# Altium PCB NBP16 Xilinx Spartan-II PQ208 Rev1.01.PcbDoc (part 2 of 2)
Units mm, origin at the board's own origin, x right, y up, seen from the top; angles counter-clockwise.
Board outline 69 x 80.99 mm, 2 copper layers (Top Layer, Bottom Layer); 48 components, 186 nets, 518 pads, 188 vias.
Unrouted connection lines stored in the file: 1.
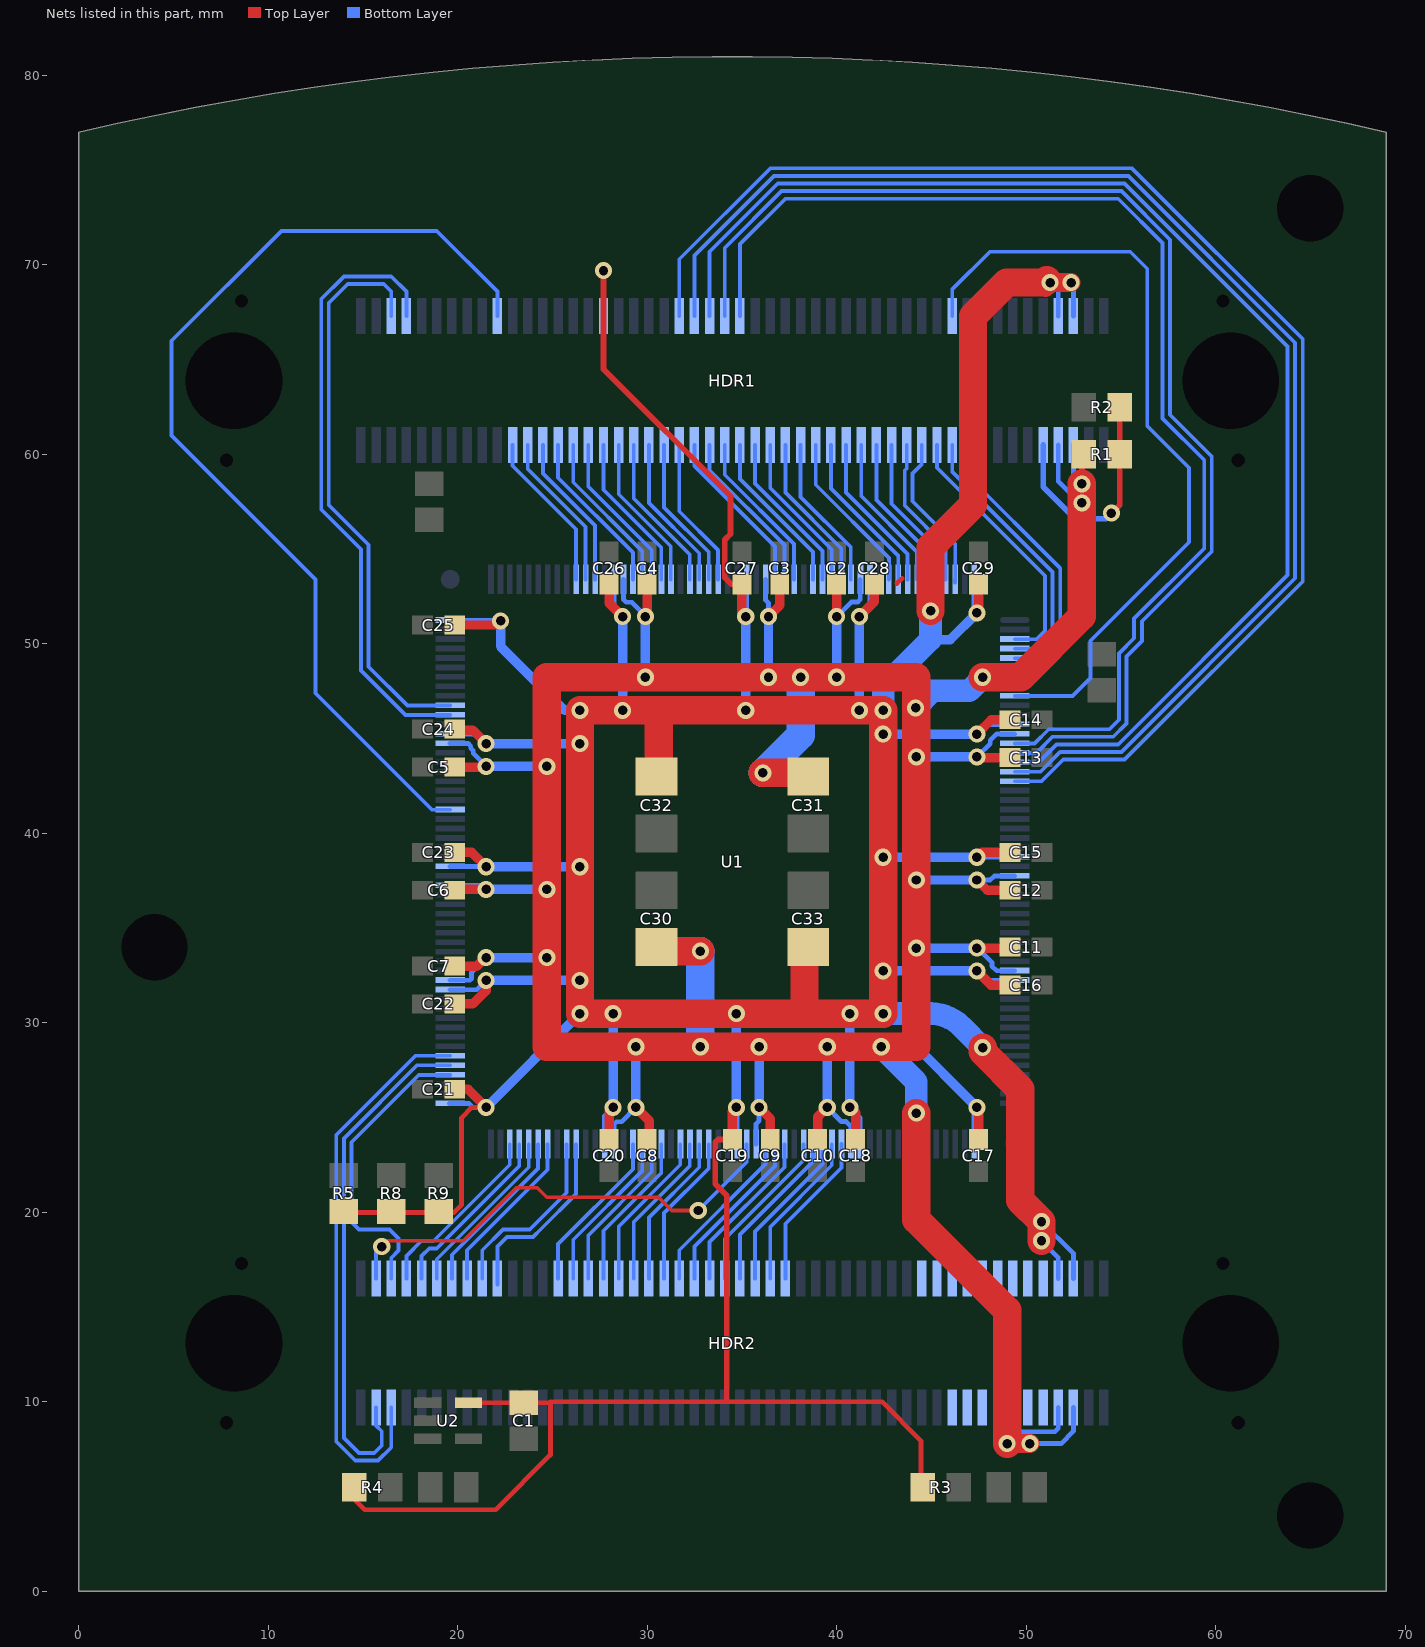
[diagram p2: the nets of this part, all layers, seen from the top]

## Via types
v1: diameter 0.9, hole 0.5, Top Layer to Bottom Layer, tented both sides, 188 vias

## Nets (pads, with @x,y where several pads share a name; then routed paths per layer and width w, separated by ;. In a path a pad name is that pad's centre, name@x,y a point inside that pad or via, vN(x,y) a via of type N, cw(c..) or ccw(c..) an arc to the next point about the centre after c; other vN are vias at no path point) (continued)
NEXUS_TMS: HDR1.80 U1.9 | length 42
  Bottom Layer w0.2: HDR1.80@46.1,67.3 46.1,68.7 48.1,70.7 55.5,70.7 56.4,69.8 56.4,61.5 58.6,59.3 58.6,55.369 53.4,50.169 53.4,48.2 52.45,47.25 U1.9@49.4,47.25
RAM0_DATA0: HDR2.42 U1.81 | length 8.1
  Bottom Layer w0.2: HDR2.42@30.9,16.5 30.9,19.966 33.25,22.316 U1.81@33.25,23.6
RAM0_DATA1: HDR2.40 U1.82 | length 8.2
  Bottom Layer w0.2: HDR2.40@30.1,16.5 30.1,19.731 32.75,22.381 U1.82@32.75,23.6
RAM0_DATA2: HDR2.38 U1.83 | length 8.3
  Bottom Layer w0.2: HDR2.38@29.3,16.5 29.3,19.497 32.25,22.447 U1.83@32.25,23.6
RAM0_DATA3: HDR2.36 U1.84 | length 8.4
  Bottom Layer w0.2: HDR2.36@28.5,16.5 28.5,19.263 31.75,22.513 U1.84@31.75,23.6
RAM0_DATA4: HDR2.34 U1.86 | length 8.4
  Bottom Layer w0.2: HDR2.34@27.7,16.5 27.7,19.028 30.75,22.078 U1.86@30.75,23.6
RAM0_DATA5: HDR2.32 U1.87 | length 8.5
  Bottom Layer w0.2: HDR2.32@26.9,16.5 26.9,18.794 30.25,22.144 U1.87@30.25,23.6
RAM0_DATA6: HDR2.30 U1.88 | length 8.6
  Bottom Layer w0.2: HDR2.30@26.1,16.5 26.1,18.56 29.75,22.21 U1.88@29.75,23.6
RAM0_DATA7: HDR2.28 U1.89 | length 8.7
  Bottom Layer w0.2: HDR2.28@25.3,16.5 25.3,18.325 29.25,22.275 U1.89@29.25,23.6
RAM0_OE: HDR1.41 U1.180 | length 8.1
  Bottom Layer w0.2: HDR1.41@30.9,60.5 30.9,57.2 33.25,54.85 U1.180@33.25,53.4
RAM0_WE: HDR1.79 U1.4 | length 14.5
  Bottom Layer w0.2: HDR1.79@46.1,60.5 46.1,59.1 51.4,53.8 51.4,50.5 50.65,49.75 U1.4@49.4,49.75
RAM1_DATA0: HDR1.45 U1.187 | length 8.9
  Bottom Layer w0.2: HDR1.45@32.5,60.5 32.5,59.4 36.75,55.15 U1.187@36.75,53.4
RAM1_DATA1: HDR1.49 U1.189 | length 8.6
  Bottom Layer w0.2: HDR1.49@34.1,60.5 34.1,58.931 37.75,55.281 U1.189@37.75,53.4
RAM1_DATA2: HDR1.53 U1.192 | length 8.6
  Bottom Layer w0.2: HDR1.53@35.7,60.5 35.7,58.463 39.25,54.913 U1.192@39.25,53.4
RAM1_DATA3: HDR1.57 U1.194 | length 8.3
  Bottom Layer w0.2: HDR1.57@37.3,60.5 37.3,57.994 40.25,55.044 U1.194@40.25,53.4
RAM1_DATA4: HDR1.55 U1.193 | length 8.4
  Bottom Layer w0.2: HDR1.55@36.5,60.5 36.5,58.228 39.75,54.978 U1.193@39.75,53.4
RAM1_DATA5: HDR1.51 U1.191 | length 8.7
  Bottom Layer w0.2: HDR1.51@34.9,60.5 34.9,58.697 38.75,54.847 U1.191@38.75,53.4
RAM1_DATA6: HDR1.47 U1.188 | length 8.7
  Bottom Layer w0.2: HDR1.47@33.3,60.5 33.3,59.166 37.25,55.216 U1.188@37.25,53.4
RAM1_DATA7: HDR1.43 U1.181 | length 7.9
  Bottom Layer w0.2: HDR1.43@31.7,60.5 31.7,57 33.75,54.95 U1.181@33.75,53.4
RAM1_OE: HDR1.39 U1.179 | length 8.2
  Bottom Layer w0.2: HDR1.39@30.1,60.5 30.1,57.434 32.75,54.784 U1.179@32.75,53.4
RAM1_WE: HDR1.61 U1.199 | length 8.7
  Bottom Layer w0.2: HDR1.61@38.9,60.5 38.9,58.4 42.76,54.54 U1.199@42.76,53.411 ; U1.199@42.75,53.4 U1.199@42.75,53.411
RAM_ADDR0: HDR1.21 U1.166 | length 8.5
  Bottom Layer w0.2: HDR1.21@22.9,60.5 22.9,59.4 26.25,56.05 U1.166@26.25,53.4
RAM_ADDR1: HDR1.25 U1.168 | length 8.2
  Bottom Layer w0.2: HDR1.25@24.5,60.5 24.5,59 27.25,56.25 U1.168@27.25,53.4
RAM_ADDR2: HDR1.29 U1.173 | length 8.6
  Bottom Layer w0.2: HDR1.29@26.1,60.5 26.1,58.534 29.75,54.884 U1.173@29.75,53.4
RAM_ADDR3: HDR1.33 U1.175 | length 8.4
  Bottom Layer w0.2: HDR1.33@27.7,60.5 27.7,58.137 30.75,55.087 U1.175@30.75,53.4
RAM_ADDR4: HDR1.65 U1.201 | length 8.4
  Bottom Layer w0.2: HDR1.65@40.5,60.5 40.5,58 43.75,54.75 U1.201@43.75,53.4
RAM_ADDR5: HDR1.69 U1.203 | length 8.2
  Bottom Layer w0.2: HDR1.69@42.1,60.5 42.1,57.6 44.75,54.95 U1.203@44.75,53.4
RAM_ADDR6: HDR1.73 U1.205 | length 8
  Bottom Layer w0.2: HDR1.73@43.7,60.5 43.7,59.266 43.6,59.166 43.6,57.3 45.75,55.15 U1.205@45.75,53.4
RAM_ADDR7: HDR1.77 U1.3 | length 13.9
  Bottom Layer w0.2: HDR1.77@45.3,60.5 45.3,59.3 51,53.6 51,50.7 50.55,50.25 U1.3@49.4,50.25
RAM_ADDR8: HDR1.75 U1.206 | length 8.4
  Bottom Layer w0.2: HDR1.75@44.5,60.5 44.5,59.5 44,59 44,57.534 46.26,55.275 U1.206@46.26,53.411 ; U1.206@46.25,53.25 U1.206@46.25,53.411
RAM_ADDR9: HDR1.71 U1.204 | length 8.1
  Bottom Layer w0.2: HDR1.71@42.9,60.5 42.9,57.4 45.25,55.05 U1.204@45.25,53.4
RAM_ADDR10: HDR1.67 U1.202 | length 8.3
  Bottom Layer w0.2: HDR1.67@41.3,60.5 41.3,57.8 44.25,54.85 U1.202@44.25,53.4
RAM_ADDR11: HDR1.63 U1.200 | length 8.6
  Bottom Layer w0.2: HDR1.63@39.7,60.5 39.7,58.2 43.26,54.64 U1.200@43.26,53.411 ; U1.200@43.25,53.4 U1.200@43.25,53.411
RAM_ADDR12: HDR1.59 U1.195 | length 8.2
  Bottom Layer w0.2: HDR1.59@38.1,60.5 38.1,57.76 40.75,55.11 U1.195@40.75,53.4
RAM_ADDR13: HDR1.35 U1.176 | length 8.2
  Bottom Layer w0.2: HDR1.35@28.5,60.5 28.5,57.903 31.25,55.153 U1.176@31.25,53.4
RAM_ADDR14: HDR1.31 U1.174 | length 8.5
  Bottom Layer w0.2: HDR1.31@26.9,60.5 26.9,58.3 30.25,54.95 U1.174@30.25,53.4
RAM_ADDR15: HDR1.27 U1.172 | length 8.7
  Bottom Layer w0.2: HDR1.27@25.3,60.5 25.3,58.769 29.25,54.819 U1.172@29.25,53.4
RAM_ADDR16: HDR1.23 U1.167 | length 8.4
  Bottom Layer w0.2: HDR1.23@23.7,60.5 23.7,59.234 26.75,56.184 U1.167@26.75,53.4
RAM_CS: HDR1.37 U1.178 | length 8.3
  Bottom Layer w0.2: HDR1.37@29.3,60.5 29.3,57.669 32.25,54.719 U1.178@32.25,53.4
RED0: HDR1.6 U1.147 | length 30.4
  Bottom Layer w0.2: HDR1.6@16.5,67.3 16.5,68.6 16.1,69 14.2,69 13.2,68 13.2,57.334 15.3,55.234 15.3,48.8 17.35,46.75 U1.147@19.6,46.75
RED1: HDR1.8 U1.146 | length 32.8
  Bottom Layer w0.2: HDR1.8@17.3,67.3 17.3,68.6 16.5,69.4 14,69.4 12.8,68.2 12.8,57.1 14.9,55 14.9,48.6 17.25,46.25 U1.146@19.6,46.25
REF_CLK: HDR2.4 U1.77 | length 24.9
  Top Layer w0.2: v1(15.996,18.196) 16.3,18.5 20.3,18.5 20.7,18.9 23.1,21.3 24.2,21.3 24.7,20.8 30.6,20.8 31.3,20.1 v1(32.7,20.1)
  Bottom Layer w0.2: HDR2.4@15.7,16.5 15.7,17.9 v1(15.996,18.196) ; v1(32.7,20.1) 35.25,22.65 U1.77@35.25,23.6
SCL: HDR2.5 U1.110 | length 29.6
  Bottom Layer w0.2: HDR2.5@16.5,9.7 16.5,7.6 15.8,6.9 14.6,6.9 13.6,7.9 13.6,24.1 17.761,28.261 U1.110@19.61,28.261
SDA: HDR2.3 U1.109 | length 27.6
  Bottom Layer w0.2: HDR2.3@15.7,9.7 15.7,8.75 16,8.45 16,7.7 15.6,7.3 14.8,7.3 14,8.1 14,23.9 17.861,27.761 U1.109@19.61,27.761
SP0: HDR2.79
SP1: HDR2.81
SP2: HDR2.83
SP3: HDR2.85
SP4: HDR2.87
SP5: HDR2.89
SP6: HDR2.91
SP7: HDR2.90
SP8: HDR2.92
SP9: HDR2.88
SP10: HDR2.86
SP11: HDR2.84
SP12: HDR2.82
SP13: HDR2.80
SP14: HDR2.78
SP15: HDR2.76
SPI_CLK: HDR1.46 U1.17 | length 71.8
  Bottom Layer w0.2: HDR1.46@32.5,67.3 32.5,70.5 36.7,74.7 55.4,74.7 64.2,65.9 64.2,53.466 55.034,44.3 51.8,44.3 50.75,43.25 U1.17@49.4,43.25
SPI_DIN: HDR1.44 U1.18 | length 74
  Bottom Layer w0.2: HDR1.44@31.7,67.3 31.7,70.3 36.5,75.1 55.6,75.1 64.6,66.1 64.6,53.3 55.2,43.9 51.966,43.9 50.816,42.75 U1.18@49.4,42.75
SPI_DOUT: HDR1.50 U1.15 | length 64.3
  Bottom Layer w0.2: HDR1.50@34.1,67.3 34.1,70.9 37.1,73.9 55.034,73.9 57.6,71.334 57.6,62.1 59.8,59.9 59.8,54.872 56.126,51.197 56.126,50.16 55.3,49.334 55.3,45.8 54.6,45.1 51.4,45.1 50.55,44.25 U1.15@49.4,44.25
SPI_MODE: HDR1.52 U1.14 | length 62
  Bottom Layer w0.2: HDR1.52@34.9,67.3 34.9,71.1 37.3,73.5 54.869,73.5 57.2,71.169 57.2,61.9 59.4,59.7 59.4,55.037 55.7,51.337 55.7,50.3 54.9,49.5 54.9,46 54.4,45.5 51.2,45.5 50.45,44.75 U1.14@49.4,44.75
SPI_SEL: HDR1.48 U1.16 | length 69.5
  Bottom Layer w0.2: HDR1.48@33.3,67.3 33.3,70.7 36.9,74.3 55.2,74.3 63.8,65.7 63.8,53.631 54.869,44.7 51.6,44.7 50.65,43.75 U1.16@49.41,43.75
SW0: HDR2.44 U1.75 | length 9
  Bottom Layer w0.2: HDR2.44@31.7,16.5 31.7,18 36.25,22.55 U1.75@36.25,23.6
SW1: HDR2.46 U1.74 | length 8.9
  Bottom Layer w0.2: HDR2.46@32.5,16.5 32.5,18.2 36.75,22.45 U1.74@36.75,23.6
SW2: HDR2.48 U1.73 | length 8.7
  Bottom Layer w0.2: HDR2.48@33.3,16.5 33.3,18.434 37.25,22.384 U1.73@37.25,23.6
SW3: HDR2.50 U1.71 | length 8.8
  Bottom Layer w0.2: HDR2.50@34.1,16.5 34.1,18.6 38.25,22.75 U1.71@38.25,23.6
SW4: HDR2.52 U1.70 | length 8.7
  Bottom Layer w0.2: HDR2.52@34.9,16.5 34.9,18.834 38.75,22.684 U1.70@38.75,23.6
SW5: HDR2.54 U1.69 | length 8.6
  Bottom Layer w0.2: HDR2.54@35.7,16.5 35.7,19 39.25,22.55 U1.69@39.25,23.6
SW6: HDR2.56 U1.68 | length 8.4
  Bottom Layer w0.2: HDR2.56@36.5,16.5 36.5,19.234 39.75,22.484 U1.68@39.75,23.6
SW7: HDR2.58 U1.67 | length 8.3
  Bottom Layer w0.2: HDR2.58@37.3,16.5 37.3,19.4 40.26,22.36 U1.67@40.26,23.611
SWC0: HDR2.18 U1.96 | length 9.8
  Bottom Layer w0.2: HDR2.18@21.3,16.5 21.3,18 22.4,19.1 23.812,19.1 25.75,21.038 U1.96@25.75,23.6
SWC1: HDR2.16 U1.98 | length 8.9
  Bottom Layer w0.2: HDR2.16@20.5,16.5 20.5,18 24.75,22.25 U1.98@24.75,23.6
SWC2: HDR2.14 U1.99 | length 9
  Bottom Layer w0.2: HDR2.14@19.7,16.5 19.7,17.766 24.25,22.316 U1.99@24.25,23.6
SWC3: HDR2.6 U1.108 | length 16
  Bottom Layer w0.2: HDR2.6@16.5,16.5 16.5,17.6 16.885,17.985 16.885,18.615 16.4,19.1 14.8,19.1 14.4,19.5 14.4,23.7 17.95,27.25 U1.108@19.6,27.25
SWR0: HDR2.20 U1.95 | length 9.9
  Bottom Layer w0.2: HDR2.20@22.1,16.2 HDR2.20@22.1,16.5 22.1,18.2 22.6,18.7 23.977,18.7 24.412,19.135 26.25,20.973 U1.95@26.25,23.6
SWR1: HDR2.12 U1.100 | length 9.1
  Bottom Layer w0.2: HDR2.12@18.9,16.5 18.9,17.531 23.75,22.381 U1.100@23.75,23.6
SWR2: HDR2.10 U1.101 | length 9.5
  Bottom Layer w0.2: HDR2.10@18.1,16.5 18.1,17.7 18.5,18.1 18.903,18.1 23.25,22.447 U1.101@23.25,23.6
SWR3: HDR2.8 U1.102 | length 9.7
  Bottom Layer w0.2: HDR2.8@17.3,16.5 17.3,17.7 18.1,18.5 18.737,18.5 22.75,22.513 U1.102@22.75,23.6
TEST: HDR1.81 U1.5 | length 15.1
  Bottom Layer w0.2: HDR1.81@46.9,60.5 46.9,58.9 51.8,54 51.8,50.3 50.75,49.25 U1.5@49.4,49.25
VCC: C1.2 C14.1 C15.1 C16.1 C17.2 C18.2 C19.2 C20.2 C21.2 C22.1 C23.1 C24.1 C25.2 C26.2 C27.2 C28.2 C29.2 C32.1 C33.1 HDR1.34 HDR1.94 HDR1.96 HDR2.94 HDR2.96 R3.1 R4.2 R5.1 R8.1 R9.1 U1.12 U1.26 U1.39 U1.53 U1.65 U1.78 U1.92 U1.105 U1.117 U1.130 U1.144 U1.156 U1.170 U1.184 U1.197 U1.208 U2.5 | length 368.1
  Top Layer w0.25: R5.1@13.708,19.992 19.808,19.992 20.208,20.392 20.208,24.992 20.758,25.542 v1(21.508,25.542) ; R4.2@14.55,5.497 14.55,4.85 15.1,4.3 22,4.3 24.9,7.2 24.9,10 ; U2.5@20.575,9.95 C1.2@23.497,9.95 24.85,9.95 24.9,10 ; 43.189,53.192 43.449,53.452 ; R3.1@44.45,5.5 R3.1@44.45,5.503 ; R3.1@44.55,5.503 44.45,5.602 44.45,7.95 42.4,10 24.9,10
  Top Layer w0.3: v1(27.7,69.7) 27.701,64.499 34.4,57.8 34.4,55.8 34.1,55.5 34.1,53.5 34.45,53.15 C27.2@35,53.15 ; 34.2,10.05 34.2,20.9 33.6,21.5 33.6,23.7 33.75,23.85 C19.2@34.5,23.85
  Top Layer w0.5: C24.1@19.758,45.442 20.808,45.442 v1(21.508,44.742) ; C21.2@19.85,26.5 20.55,26.5 v1(21.508,25.542) ; C22.1@19.85,31 20.8,31 21.508,31.708 v1(21.508,32.242) ; C23.1@19.85,39 20.75,39 v1(21.508,38.242) ; C25.2@19.85,51 22.048,51 v1(22.265,51.217) ; C20.2@28,23.85 28,25.334 v1(28.208,25.542) ; C26.2@28.008,53.192 28.008,52.142 v1(28.708,51.442) ; C19.2@34.5,23.85 34.5,25.334 v1(34.708,25.542) ; C27.2@35,53.15 35,51.65 v1(35.208,51.442) ; v1(40.708,25.542) 41,25.25 C18.2@41,23.85 ; v1(41.208,51.442) 42,52.234 C28.2@42,53.15 ; v1(47.408,25.542) 47.5,25.45 C17.2@47.5,23.85 ; v1(47.408,32.742) 48.15,32 C16.1@49.15,32 ; v1(47.408,38.742) 47.666,39 C15.1@49.15,39 ; v1(47.408,45.242) 48.166,46 C14.1@49.15,46 ; v1(47.408,51.642) 47.5,51.734 C29.2@47.5,53.15
  Top Layer w1: v1@51.018,68.819 51.25,69.05 v1(51.275,69.075) v1(52.375,69.075)
  Top Layer w1.5: C32.1@30.608,43.192 30.608,46.492 ; 38.308,30.492 C33.1@38.308,33.792 ; v1(44.958,51.742) 44.958,55.098 47.2,57.34 47.2,67.3 48.975,69.075 50.975,69.075 v1@51.1,69.2 ; v1(47.708,28.692) 47.708,28.489 49.7,26.497 49.7,20.633 v1(50.815,19.518) v1(50.815,18.502) ; v1(26.458,30.492) v1(42.458,30.492) v1(42.458,46.492) v1(26.458,46.492) v1(26.458,30.492)
  Bottom Layer w0.25: U1.105@19.558,25.742 20.608,25.742 20.808,25.542 v1(21.508,25.542) ; U1.117@19.6,31.75 21.016,31.75 v1(21.508,32.242) ; U1.130@19.6,38.25 21.5,38.25 v1(21.508,38.242) ; U1.144@19.6,45.25 21,45.25 v1(21.508,44.742) ; U1.156@19.6,51.25 22.233,51.25 v1(22.265,51.217) v1@21.96,51.242 ; HDR1.34@27.7,67.3 v1(27.7,69.7) ; U1.92@27.75,23.6 27.75,25.084 v1(28.208,25.542) ; U1.170@28.25,53.4 28.25,51.9 v1(28.708,51.442) ; v1(34.708,25.542) 34.75,25.5 U1.78@34.75,23.6 ; v1(35.208,51.442) 35.25,51.484 U1.184@35.25,53.4 ; v1(40.708,25.542) 41.25,25 U1.65@41.25,23.6 ; v1(41.208,51.442) 41.75,51.984 U1.197@41.75,53.4 ; U1.53@47.25,23.6 47.25,25.384 v1(47.408,25.542) ; U1.208@47.25,53.4 47.25,51.8 v1(47.408,51.642) ; v1(47.408,32.742) 47.9,32.25 U1.39@49.4,32.25 ; v1(47.408,38.742) U1.26@49.392,38.742 ; v1(47.408,45.242) 47.916,45.75 U1.12@49.4,45.75 ; v1(50.815,18.502) 51.7,17.617 HDR2.94@51.7,16.5 ; v1(50.815,19.518) 52.5,17.833 HDR2.96@52.5,16.5 ; v1(51.275,69.075) 51.7,68.65 HDR1.94@51.7,67.3 ; v1(52.375,69.075) 52.5,68.95 HDR1.96@52.5,67.3
  Bottom Layer w0.5: v1(21.508,25.542) v1(26.458,30.492) ; v1(21.508,32.242) v1(26.458,32.242) ; v1(21.508,38.242) v1(26.458,38.242) ; v1(21.508,44.742) v1(26.458,44.742) ; v1(22.265,51.217) 22.265,49.871 25.644,46.492 v1(26.458,46.492) ; v1(28.208,25.542) v1(28.208,30.492) ; v1(28.708,46.492) v1(28.708,51.442) ; v1(34.708,25.542) v1(34.708,30.492) ; v1(35.208,46.492) v1(35.208,51.442) ; v1(40.708,25.542) v1(40.708,30.492) ; v1(41.208,46.492) v1(41.208,51.442) ; v1(42.458,32.742) v1(47.408,32.742) ; v1(42.458,38.742) v1(47.408,38.742) ; v1(42.458,45.242) v1(47.408,45.242) ; 43.808,30.492 43.808,29.142 v1(47.408,25.542) ; 44.958,50.233 45.999,50.233 v1(47.408,51.642)
  Bottom Layer w1.2: v1(42.458,30.492) 44.955,30.492 cw(c44.955,28.192) 46.582,29.819 v1(47.708,28.692) ; v1(42.458,46.492) 42.458,47.733 44.958,50.233 v1(44.958,51.742)
VCCINT: C2.1 C3.1 C4.1 C5.1 C6.1 C7.1 C8.1 C9.1 C10.1 C11.1 C12.1 C13.1 C30.1 C31.1 HDR1.93 HDR1.95 HDR2.93 HDR2.95 R1.1 U1.13 U1.28 U1.38 U1.66 U1.76 U1.91 U1.118 U1.128 U1.143 U1.171 U1.186 U1.196 | length 244.3
  Top Layer w0.3: v1(52.95,58.45) 52.95,59.903 R1.1@53.05,60.003
  Top Layer w0.5: C7.1@19.85,33 21.022,33 v1@21.465,33.442 ; C6.1@19.85,37 19.892,37.042 v1(21.508,37.042) ; C5.1@19.85,43.5 21.466,43.5 v1(21.508,43.542) ; v1(29.408,25.542) 30.108,24.842 C8.1@30.108,23.792 ; v1(29.908,51.442) 30,51.534 C4.1@30,53.15 ; v1(35.908,25.542) 36.5,24.95 C9.1@36.5,23.85 ; v1(36.408,51.442) 37,52.034 C3.1@37,53.15 ; C10.1@39,23.85 39,25.034 v1(39.508,25.542) ; v1@40,51.45 C2.1@40,53.15 ; v1(47.408,33.942) 49.092,33.942 C11.1@49.15,34 ; v1(47.408,37.542) 47.95,37 C12.1@49.15,37 ; v1(47.408,44.042) 47.45,44 C13.1@49.15,44
  Top Layer w1: v1@48.783,8.037 v1(49,7.8) v1(50.2,7.8)
  Top Layer w1.5: C30.1@30.608,33.792 v1(32.808,33.792) ; v1(36.108,43.192) C31.1@38.308,43.192 ; v1(44.208,25.242) 44.208,19.623 49,14.831 v1(49,7.8) ; v1(47.708,48.242) 49.72,48.242 52.95,51.473 v1(52.95,58.45) ; 24.708,28.742 44.208,28.742 44.208,48.242 24.708,48.242 24.708,28.742
  Bottom Layer w0.25: U1.118@19.6,32.25 20.65,32.25 20.739,32.339 20.739,32.673 v1(21.508,33.442) ; U1.128@19.6,37.25 21.3,37.25 v1(21.508,37.042) ; U1.143@19.6,44.75 20.55,44.75 20.7,44.6 20.7,44.5 20.826,44.374 20.826,44.224 v1(21.508,43.542) v1@21.458,43.542 ; U1.91@28.25,23.6 28.25,24.65 28.389,24.789 28.654,24.789 v1(29.408,25.542) ; U1.171@28.75,53.4 28.75,52.35 28.9,52.2 29.2,52.2 29.908,51.492 v1(29.908,51.442) ; U1.76@35.75,23.6 35.75,24.684 35.908,24.842 v1(35.908,25.542) ; U1.186@36.25,53.4 36.25,52.3 36.408,52.142 v1(36.408,51.442) ; v1(40.008,51.442) 40.777,52.211 41.111,52.211 41.25,52.35 U1.196@41.25,53.4 ; 40.208,24.842 v1(39.508,25.542) 40.256,24.794 40.506,24.794 40.75,24.55 U1.66@40.75,23.6 ; v1(47.408,33.942) 47.458,33.942 48.2,33.2 48.2,33 48.45,32.75 U1.38@49.4,32.75 ; v1(47.408,37.542) 48.108,37.542 48.316,37.75 U1.28@49.4,37.75 ; v1(47.408,44.042) 48.106,44.741 48.106,44.906 48.45,45.25 U1.13@49.4,45.25 ; v1(49,7.8) 49.65,8.425 51.525,8.425 51.7,8.6 HDR2.93@51.7,9.7 ; v1(50.2,7.8) 51.85,7.8 52.5,8.45 HDR2.95@52.5,9.7 ; 51.7,59.3 HDR1.93@51.7,60.5 51.7,58.575 52.75,57.525 v1(52.949,57.44) ; 52.5,59.425 HDR1.95@52.5,60.5 52.5,58.9 v1(52.95,58.45)
  Bottom Layer w0.5: v1(21.508,33.442) v1(24.708,33.442) ; v1(21.508,37.042) v1(24.708,37.042) ; v1(21.508,43.542) v1(24.708,43.542) ; v1(29.408,25.542) v1(29.408,28.742) ; v1(29.908,48.242) v1(29.908,51.442) ; v1(35.908,25.542) v1(35.908,28.742) ; v1(36.408,48.242) v1(36.408,51.442) ; v1(39.508,25.542) v1(39.508,28.742) ; v1(40.008,48.242) v1(40.008,51.442) ; v1(44.208,33.942) v1(47.408,33.942) ; v1(44.208,37.542) v1(47.408,37.542) ; v1(44.208,44.042) v1(47.408,44.042)
  Bottom Layer w1.2: v1(42.358,28.742) 44.208,26.892 v1(44.208,25.242) ; v1(44.175,46.625) 45.05,47.525 47,47.525 v1(47.708,48.242)
  Bottom Layer w1.5: v1(32.808,28.742) v1(32.808,33.792) ; v1(36.108,43.192) 38.108,45.192 v1(38.108,48.242)
VDRIVE: HDR1.20 U1.136 | length 53.6
  Bottom Layer w0.2: U1.136@19.6,41.25 18.65,41.25 12.5,47.4 12.5,53.4 4.9,61 4.9,66 10.7,71.8 18.9,71.8 22.1,68.6 HDR1.20@22.1,67.3
VREF: HDR1.91 R1.2 R2.1 | length 12.4
  Top Layer w0.3: v1(54.5,56.9) 54.95,57.35 R2.1@54.95,62.497
  Bottom Layer w0.3: HDR1.91@50.9,60.5 50.9,58.3 52.6,56.6 54.2,56.6 v1(54.5,56.9)
pads on no net: HDR1.MH1 HDR1.MH2 HDR1.MH3 HDR1.MH4 HDR1.MH5 HDR1.MH6 HDR2.MH1 HDR2.MH2 HDR2.MH3 HDR2.MH4 HDR2.MH5 HDR2.MH6 U1.55 U1.56 U1.60 U1.149 U1.FID1 U1.FID2 U2.1

## Polygon pours and split planes (outlines as drawn)
GND on Top Layer "Top Layer-GND" (solid, remove dead copper, pour order 1000): 0,0 0,82.2 69,82.2 69,0
GND on Bottom Layer "Bottom Layer-GND" (solid, remove dead copper, pour order 1001): 0,0 0,82.1 69,82.1 69,0

## Keep-outs
Keep-Out Layer:
  the board outline again, w0.8

## Silkscreen, mask and mechanical layers (free items; w line width, h text height)
Top Overlay:
  circle w0.127: c65,73 r2.5
  circle w0.127: c65,4 r2.5
  circle w0.127: c4,34 r2.5
  lines w0.127: 0,1.5 1.5,1.5 1.5,0 ; 0,22.3 1.5,22.3 1.5,23.4 0,23.4 ; 0.001,53.6 1.501,53.6 1.501,54.7 0.001,54.7 ; 0,75.5 1.5,75.5 1.5,77.3 ; 15.7,79.8 15.7,78.1 17,78.1 17,79.9 ; 49.7,80.2 49.7,78.7 51,78.7 51,80.1 ; 67.5,0 67.5,1.5 69,1.5 ; 67.5,77.3 67.5,75.5 69,75.5 ; 68.999,22.3 67.5,22.3 67.5,23.4 69,23.4 ; 69,53.6 67.501,53.6 67.501,54.7 69.001,54.7
Bottom Overlay:
  drawing of 853 lines, arcs and shapes, not listed
  text "REV 1.01" at 47.6,76.5 h1.3
  text "NBP16" at 54.981,76.481 h1.3
  text "1" at 13.97,58.42 h1
  text "1" at 14.224,7.62 h1
PCB Boundary:
  the board outline again, w0.25
  text "PCB boundary coincides with centre-line of tracks and arc" at 0,-12 h0.75
Gerber ID:
  text ".Layer_Name" at 0,-6 h0.75
Printout ID:
  text ".Printout_Name" at 0,-10 h0.75
Design Information:
  drawing of 713 lines, arcs and shapes, not listed
  text "NBP16 REV 1.01" at 317.627,202.041 h1.27
  text "DESIGN INFORMATION" at 261.62,201.914 h1.52
  text "BOARD NAME:" at 299.212,201.914 h1.52
  text "BOARD TECHNOLOGY" at 261.62,199.374 h1.52
  text "BOARD SIZE (REFER ALSO PROFILING INFORMATION)" at 309.88,199.374 h1.27
  text "69.00mm" at 312.6,197.1 h1.52
  text "11.811" at 277.419,197.012 h1.52
  text "81.00mm" at 335.6,197 h1.52
  text "7.874" at 291.389,196.885 h1.52
  text "7.874" at 264.446,196.834 h1.52
  text "X" at 328.549,196.326 h1.78
  text "(MIN. TRACK/   PADS  /   CLEARANCE     IN 0.001'')" at 260.096,194.294 h1.27
  text "MINIMUM ANNULAR RING 0.05MM (0.002'') EXTERNAL PER IPC-2221 CLASS 3 LEVEL C AND IS THE" at 261.62,191.754 h1.27
  text "MANUFACTURING REGISTRATION ALLOWANCE" at 261.62,189.468 h1.27
  text "LAND SIZE CALCULATION MINIMUM - NOMINAL HOLE SIZE + 0.508MM (0.020'')" at 261.62,186.674 h1.27
  text "AS INSTRUCTED" at 347.65,182.28 h1.52
  text "X" at 299.263,182.153 h1.52
  text "CIRCUIT TYPE:" at 261.62,182.102 h1.52
  text "SS" at 284.48,182.102 h1.27
  text "DS" at 302.26,182.102 h1.27
  text "X" at 316.865,182.102 h1.52
  text "PTH" at 320.04,182.102 h1.27
  text "ML" at 330.962,182.102 h1.27
  text "No. OFF" at 337.82,182.102 h1.27
  text "FINGER CONNECTOR DIM PER:" at 261.62,179.054 h1.52
  text "AS SHOWN" at 337.82,179.054 h1.27
  text "No. OFF TOTAL" at 278.384,176.26 h1.52
  text "ONE SIDE" at 320.04,176.26 h1.27
  text "BOTH SIDES" at 337.82,176.006 h1.27
  text "VIAS:" at 261.62,173.339 h1.52
  text "NONE" at 273.05,173.339 h1.14
  text "X" at 281.432,173.339 h1.52
  text "FEED THRU'" at 284.48,173.339 h1.14
  text "X" at 299.212,173.339 h1.52
  text "TENTED" at 302.26,173.339 h1.14
  text "UNIQUE DRILL" at 284.48,170.291 h1.14
  text "2 SIZE" at 302.26,170.291 h1.14
  text "BLIND LAYER SEQUENCE" at 320.04,170.291 h1.14
  text "Layer Stack Manager (Protel)" at 297.053,168.005 h1.27
  text "X" at 334.772,168.005 h1.52
  text "AS SHOWN" at 337.82,168.005 h1.27
  text "LAYER CONSTRUCTION PER:" at 261.62,167.878 h1.52
  text "Protel" at 342.646,165.338 h1.27
  text "(PFW)" at 352.933,165.211 h1.27
  text "ARTWORK:" at 261.62,165.084 h1.52
  text "MANUAL" at 284.48,165.084 h1.27
  text "DIGITISED" at 302.26,165.084 h1.27
  text "X" at 316.992,165.084 h1.52
  text "CAD" at 320.04,165.084 h1.27
  text "TYPE" at 330.962,165.084 h1.27
  text "ARTWORK/PATTERN MASTER LIST" at 261.62,160.385 h1.52
  text "DESCRIPTION" at 262.89,157.972 h1.27
  text "DRAWING No./CAD FILE REF." at 281.559,157.972 h1.27
  text "LAYER NAME" at 322.834,157.972 h1.27
  text "GERBER FILE REF" at 343.586,157.896 h1.27
  text "PCB FILE" at 261.366,155.432 h1.27
  text "BOCD_SpartanII_PQ208" at 281.237,155.356 h1.27
  text "PcbDoc" at 312.979,155.356 h1.02
  text "Top Paste Mask" at 321.158,152.892 h1.02
  text "GTP" at 363.779,152.816 h1.27
  text "GERBER FILE" at 261.366,152.765 h1.27
  text "GTO" at 363.728,150.327 h1.27
  text "Top Overlay" at 321.158,150.301 h1.02
  text "GERBER FILE" at 261.366,150.225 h1.27
  text "Top Solder Mask" at 321.158,147.863 h1.02
  text "GTS" at 363.779,147.736 h1.27
  text "GERBER FILE" at 261.366,147.685 h1.27
  text "TOP LAYER" at 321.158,145.272 h1.02
  text "GTL" at 363.779,145.196 h1.27
  text "GERBER FILE" at 261.366,145.145 h1.27
  text "BOTTOMLAYER" at 321.158,142.732 h1.02
  text "GBL" at 363.779,142.656 h1.27
  text "GERBER FILE" at 261.366,142.605 h1.27
  text "Bottom Solder Mask" at 321.158,140.243 h1.02
  text "GBS" at 363.779,140.116 h1.27
  text "GERBER FILE" at 261.366,140.065 h1.27
  text "Bottom Overlay" at 321.158,137.652 h1.02
  text "GBO" at 363.779,137.576 h1.27
  text "GERBER FILE" at 261.366,137.525 h1.27
  text "Bottom Paste Mask" at 321.158,135.163 h1.02
  text "GBP" at 363.779,135.036 h1.27
  text "GERBER FILE" at 261.366,134.985 h1.27
  text "PCB Boundary" at 321.158,132.572 h1.02
  text "GM1" at 363.779,132.496 h1.27
  text "GERBER FILE" at 261.366,132.445 h1.27
  text "APERTURE LIST" at 261.366,130.032 h1.27
  text "APR" at 313.979,129.956 h1.27
  text "DRILL REPORT" at 261.366,127.492 h1.27
  text "DRR" at 313.979,127.416 h1.27
  text "EXCELLON DRILL" at 261.366,124.952 h1.27
  text "TXT" at 313.979,124.876 h1.27
  text "MATERIAL:" at 261.62,99.298 h1.52
  text "GLASS FIBRE EPOXY RESIN NEMA GRADE FR4 (MIL-S-13949H)" at 287.274,99.044 h1.27
  text "X" at 284.607,98.917 h1.52
  text "THICKNESS:" at 269.494,96.123 h1.27
  text "0.8mm" at 287.274,96.123 h1.27
  text "1.2mm" at 304.927,96.123 h1.27
  text "1.6mm" at 322.58,96.123 h1.27
  text "2.4mm" at 340.36,96.123 h1.27
  text "3.2mm" at 358.14,96.123 h1.27
  text "X" at 320.167,95.996 h1.52
  text "TOLERANCE:" at 269.367,93.075 h1.27
  text "IN A/W IPC-D-300G CLASS" at 287.02,93.075 h1.27
  text "3 LEVEL B" at 321.945,93.075 h1.27
  text "OTHER +/-" at 340.36,93.075 h1.27
  text "X" at 284.607,92.948 h1.52
  text "BOW & TWIST:" at 266.954,90.027 h1.27
  text "IN A/W IPC-D-300G CLASS" at 287.02,90.027 h1.27
  text "3 LEVEL B" at 321.945,90.027 h1.27
  text "AS SHOWN" at 340.487,89.9 h1.27
  text "X" at 284.607,89.773 h1.52
  text "COPPER THICKNESS (FINISHED)" at 269.367,86.725 h1.27
  text "OUTER:" at 274.193,84.439 h1.27
  text "18um" at 287.274,84.439 h1.27
  text "35um" at 314.325,84.439 h1.27
  text "70um" at 340.614,84.439 h1.27
  text "X" at 311.582,84.236 h1.52
  text "INNER SIGNAL:" at 265.811,81.391 h1.27
  text "18um" at 287.274,81.391 h1.27
  text "35um" at 314.325,81.391 h1.27
  text "70um" at 340.614,81.391 h1.27
  text "INNER PWR:" at 269.494,78.343 h1.27
  text "18um" at 287.274,78.343 h1.27
  text "35um" at 314.325,78.343 h1.27
  text "70um" at 340.614,78.343 h1.27
  text "STRUCTURE:" at 261.62,75.295 h1.52
  text "REFER" at 287.274,75.295 h1.27
  text "AS PER DRAWING No." at 287.147,72.12 h1.27
  text "AS SHOWN" at 340.487,72.12 h1.27
  text "X" at 337.947,71.993 h1.52
  text "DRILLING:" at 261.62,69.326 h1.52
  text "VIEWED FROM:" at 266.573,67.04 h1.27
  text "COMPONENT SIDE" at 287.274,67.04 h1.14
  text "SOLDER SIDE" at 314.071,67.04 h1.14
  text "X" at 284.607,66.786 h1.52
  text "REFERENCE:" at 268.859,63.992 h1.27
  text "AS SHOWN" at 287.147,63.865 h1.14
  text "PATTERN MASTER LIST" at 314.198,63.865 h1.14
  text "X" at 337.947,63.865 h1.52
  text "NC_DRILL FILES" at 340.487,63.865 h1.14
  text "X" at 284.607,63.738 h1.52
  text "PTH MINIMUM COPPER THICKNESS:" at 274.701,60.944 h1.27
  text "20um" at 314.325,60.944 h1.27
  text "X" at 311.658,60.817 h1.52
  text "OTHER" at 340.487,60.817 h1.27
  text "NPTH:" at 275.209,57.896 h1.27
  text "TENTED" at 287.147,57.769 h1.14
  text "X" at 311.658,57.769 h1.52
  text "PADS REMOVED" at 314.198,57.769 h1.14
  text "REMOVE PADS" at 340.487,57.769 h1.14
  text "X" at 284.607,57.642 h1.52
  text "2nd DRILL" at 287.147,54.721 h1.14
  text "BOTH" at 314.198,54.721 h1.14
  text "AS SHOWN" at 326.517,54.721 h1.14
  text "NONE" at 340.487,54.721 h1.14
  text "BOARD FINISH:" at 261.62,51.8 h1.52
  text "X" at 284.607,51.673 h1.52
  text "ETCHING" at 287.147,51.673 h1.14
  text "REFER PATTERN MASTER LIST" at 314.198,51.673 h1.14
  text "LEGEND / SCREEN PRINT:" at 281.94,48.752 h1.27
  text "NONE" at 314.198,48.625 h1.14
  text "COMPONENT" at 326.517,48.625 h1.14
  text "SOLDER" at 340.487,48.625 h1.14
  text "X" at 323.977,48.498 h1.52
  text "X" at 337.947,48.498 h1.52
  text "COLOUR:" at 272.161,45.704 h1.27
  text "WHITE" at 287.147,45.577 h1.14
  text "YELLOW" at 314.198,45.577 h1.14
  text "OTHER" at 340.487,45.577 h1.14
  text "X" at 284.607,45.45 h1.52
  text "X" at 284.607,42.529 h1.52
  text "LIQUID PHOTOIMAGEABLE" at 287.147,42.529 h1.14
  text "SCREEN PRINT" at 326.517,42.529 h1.14
  text "MATTE" at 287.147,39.481 h1.14
  text "GLOSS" at 299.847,39.481 h1.14
  text "GREEN" at 314.198,39.481 h1.14
  text "BLUE" at 326.517,39.481 h1.14
  text "G/Y" at 340.487,39.481 h1.14
  text "OTHER" at 351.917,39.481 h1.14
  text "X" at 297.18,39.354 h1.52
  text "SOLDER MASK COLOUR:" at 261.62,36.56 h1.14
  text "BLACK" at 287.147,36.433 h1.14
  text "GREEN" at 299.847,36.433 h1.14
  text "YELLOW" at 314.198,36.433 h1.14
  text "BLUE" at 326.517,36.433 h1.14
  text "OTHER" at 340.487,36.433 h1.14
  text "X" at 284.48,36.306 h1.52
  text "TRACK FINISH:" at 261.62,33.512 h1.52
  text "SELECTIVE SOLDER (HASL)" at 287.147,33.385 h1.14
  text "REFLOW SOLDER" at 326.517,33.385 h1.14
  text "SELECTIVE GOLD" at 287.147,30.337 h1.14
  text "um  (AREA" at 314.198,30.337 h1.14
  text "sq. mm)" at 342.011,30.337 h1.14
  text "X" at 284.607,27.289 h1.52
  text "IMMERSION GOLD" at 287.147,27.289 h1.14
  text "OTHER" at 326.517,27.289 h1.14
  text "EDGE BOARD" at 261.62,24.368 h1.52
  text "1.3um HARD GOLD OVER 5um     NICKEL / TIN-NICKEL" at 287.147,24.241 h1.14
  text "CONTACTS:" at 261.62,22.209 h1.52
  text "HARD FINISH GOLDE PLATE" at 287.147,21.193 h1.14
  text "OTHER" at 326.517,21.193 h1.14
  text "AS SHOWN" at 287.147,18.145 h1.14
  text "REFER" at 326.517,18.145 h1.14
  text "PROFILING:" at 261.62,15.097 h1.52
  text "AS DIMENSIONED, MEASURED AND CUT FROM SPECIFIED DATUM." at 287.147,15.097 h1.14
  text "X" at 284.607,14.97 h1.52
  text "REFER PCB BLANK DWG No." at 287.274,12.176 h1.27
  text "USE PROFILE / ROUTE TAPE SUPPLIED (REFER PATTERN MASTER LIST)" at 287.274,9.128 h1.27
  text "SQUARE CUT" at 287.274,6.08 h1.27
  text "N.C. ROUTE" at 305.054,6.08 h1.27
  text "V. SCORE" at 322.834,6.08 h1.27
  text "BLANK" at 340.614,6.08 h1.27
  text "ACCEPTABILITY:" at 261.62,3.413 h1.52
  text "MATERIALS AND WORKMANSHIP FOR ALL PRINTED WIRING BOARDS TO MEET" at 283.845,3.286 h1.27
  text "OR EXCEED THE REQUIREMENTS OF:" at 283.845,0.492 h1.27
  text "IPC-6011/12 AND IPC-A-600E" at 287.401,-2.175 h1.27
  text "1" at 322.961,-2.175 h1.27
  text "2" at 331.851,-2.175 h1.27
  text "X" at 329.184,-2.302 h1.52
  text "X" at 284.734,-2.429 h1.52
  text "3" at 340.741,-4.334 h1.27
  text "UL CERTIFICATION" at 287.401,-5.223 h1.27
  text "AUSTEL" at 322.961,-5.223 h1.27
  text "X" at 284.734,-5.35 h1.52
  text "ML-P-55110F GRP" at 286.893,-8.271 h1.02
  text "A" at 305.181,-8.271 h1.27
  text "B" at 314.071,-8.271 h1.27
  text "AS2546" at 322.961,-8.271 h1.27
  text "OTHER" at 340.741,-8.271 h1.27
  text "ADDITIONAL" at 261.62,-11.192 h1.52
  text "NONE" at 287.401,-11.446 h1.27
  text "SAMPLE PLAN" at 305.181,-11.446 h1.27
  text "MIL-P-55110E SERIAL Nos. PER ORDER" at 322.961,-11.446 h1.27
  text "REQUIREMENTS:" at 261.62,-13.605 h1.52
  text "NONE" at 287.401,-14.494 h1.27
  text "ML-P-55110F GRP" at 304.673,-14.494 h1.02
  text "A" at 322.961,-14.494 h1.27
  text "B" at 331.851,-14.494 h1.27
  text "IPC CLASS:" at 337.82,-14.494 h1.27
  text "1" at 353.314,-14.494 h1.27
  text "2" at 359.664,-14.494 h1.27
  text "3" at 366.014,-14.494 h1.27
  text "QUALITY RELEASE REPORT" at 305.181,-17.542 h1.27
  text "OTHER" at 345.694,-17.542 h1.27
  text "PER ORDER" at 354.203,-17.669 h1.27
  text "X" at 343.027,-17.796 h1.52
  text "NONE" at 305.181,-20.59 h1.27
  text "REQUIRED" at 322.961,-20.59 h1.27
  text "PER ORDER" at 345.821,-20.59 h1.27
  text "ELECTRICAL TEST:" at 261.62,-20.717 h1.52
  text "X" at 320.294,-20.717 h1.52
  text "NONE" at 305.181,-23.638 h1.27
  text "1 SIDE" at 322.834,-23.638 h1.14
  text "2 SIDES" at 334.01,-23.638 h1.14
  text "MIN. PITCH" at 345.694,-23.638 h1.27
  text "0.50mm" at 359.283,-23.638 h1.27
  text "SURFACE MOUNT:" at 261.62,-23.765 h1.52
  text "X" at 331.775,-23.841 h1.52
  text "NONE" at 305.181,-26.686 h1.27
  text "FOIL" at 322.961,-26.686 h1.27
  text "LEGEND" at 334.391,-26.686 h1.27
  text "REFER" at 345.694,-26.686 h1.27
  text "MANUFACTURER'S ID/LOGO:" at 261.62,-26.813 h1.52
  text "ISO9001/AS3901" at 308.991,-29.734 h1.27
  text "NONE" at 345.694,-29.734 h1.27
  text "MANUFACTURER'S ACCREDITATION:" at 261.62,-29.861 h1.52
  text "X" at 306.324,-29.861 h1.52
  text "PER ORDER" at 305.181,-32.782 h1.27
  text "REFER" at 322.961,-32.782 h1.27
  text "PACKAGING AND HANDLING:" at 261.62,-32.909 h1.52
  text "X" at 302.514,-33.036 h1.52
Sheet:
  drawing of 1882 lines, arcs and shapes, not listed
  text "1" at 3.717,207.391 h1.78
  text "2" at 52.756,207.391 h1.78
  text "3" at 102.015,207.391 h1.78
  text "4" at 151.308,207.391 h1.78
  text "5" at 200.584,207.391 h1.78
  text "6" at 249.606,207.391 h1.78
  text "7" at 299.136,207.391 h1.78
  text "8" at 348.158,207.391 h1.78
  text "A" at -18.415,173.406 h1.78
  text "A" at 370.205,173.406 h1.78
  text "B" at -18.415,102.794 h1.78
  text "B" at 370.205,102.794 h1.78
  text "C" at -18.415,32.182 h1.78
  text "C" at 370.205,32.182 h1.78
  text "D" at -18.415,-37.922 h1.78
  text "D" at 370.205,-37.922 h1.78
  text "ENGINEER:" at 255.27,-38.1 h1.14
  text "TITLE:" at 293.37,-38.1 h1.14
  text "PCB DESIGNER:" at 255.27,-45.593 h1.14
  text "DATE:" at 255.27,-53.34 h1.14
  text "PART NO.:" at 293.37,-53.34 h1.14
  text "REV:" at 346.71,-53.34 h1.14
  text "Altium Limited" at 222.25,-55.88 h1.78
  text ".PRINT_DATE" at 256.54,-56.388 h1.78
  text "12a Rodborough Rd" at 222.25,-58.42 h1.78
  text "Frenchs Forest" at 222.25,-60.96 h1.78
  text "FILE NAME:" at 255.27,-60.96 h1.14
  text "DWG NO:" at 293.37,-60.96 h1.14
  text "SCALE:" at 346.71,-60.96 h1.14
  text "NSW 2086" at 222.25,-63.5 h1.78
  text ".PCB_FILE_NAME_NO_PATH" at 256.54,-64.008 h1.78
  text "1" at 3.717,-69.469 h1.78
  text "2" at 52.756,-69.469 h1.78
  text "3" at 102.015,-69.469 h1.78
  text "4" at 151.308,-69.469 h1.78
  text "5" at 200.584,-69.469 h1.78
  text "6" at 249.606,-69.469 h1.78
  text "7" at 299.136,-69.469 h1.78
  text "8" at 348.158,-69.469 h1.78
Drill Drawing:
  text ".Legend" at 0,-8 h0.75

## Dimensions
0,0 to 69,0 on Dimensions
0,0 to 0.001,77 on Dimensions
34.5,-69.801 to 34.5,84 on Dimensions